# Altium PCB Holder_Base_V2.PcbDoc
Units mm, origin at the board's own origin, x right, y up, seen from the top; angles counter-clockwise.
Board outline 70 x 50 mm, 2 copper layers (Top Layer, Bottom Layer); 9 components, 27 nets, 35 pads, 0 vias.
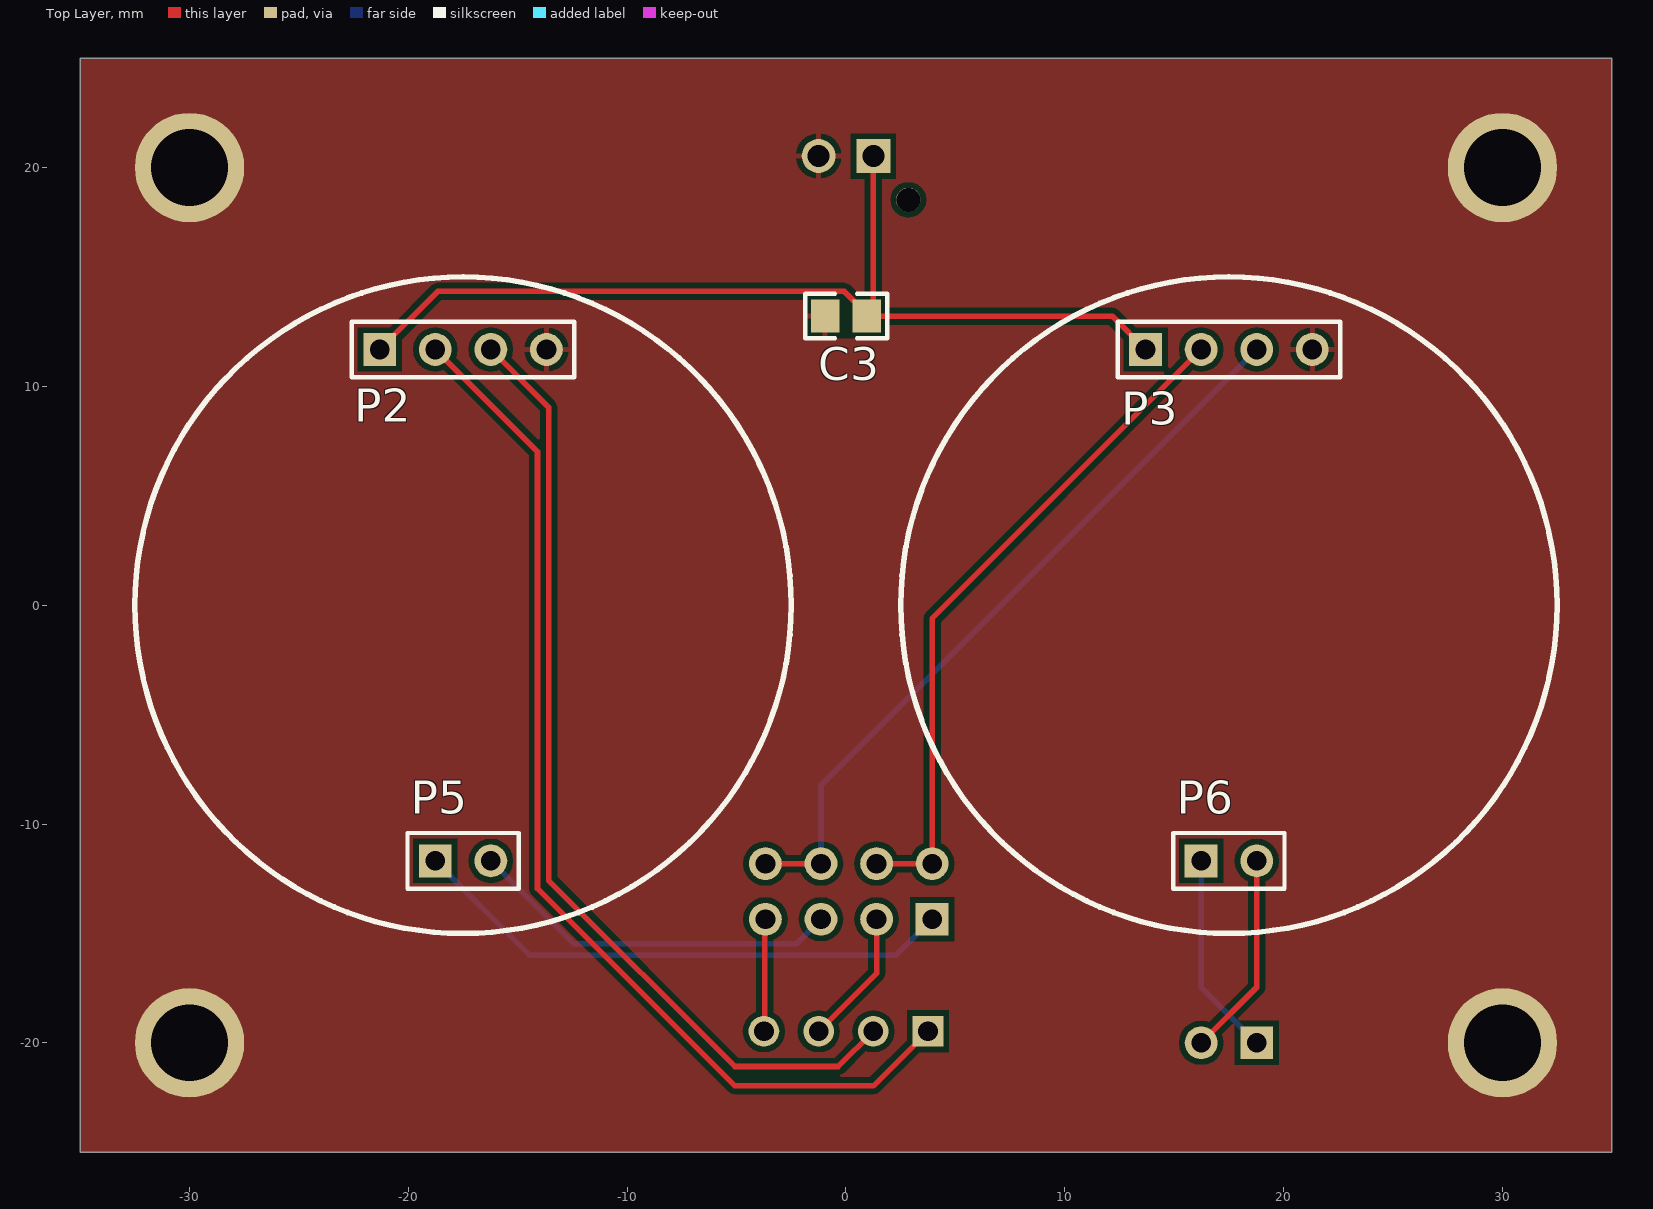
[diagram p0: Top Layer view]
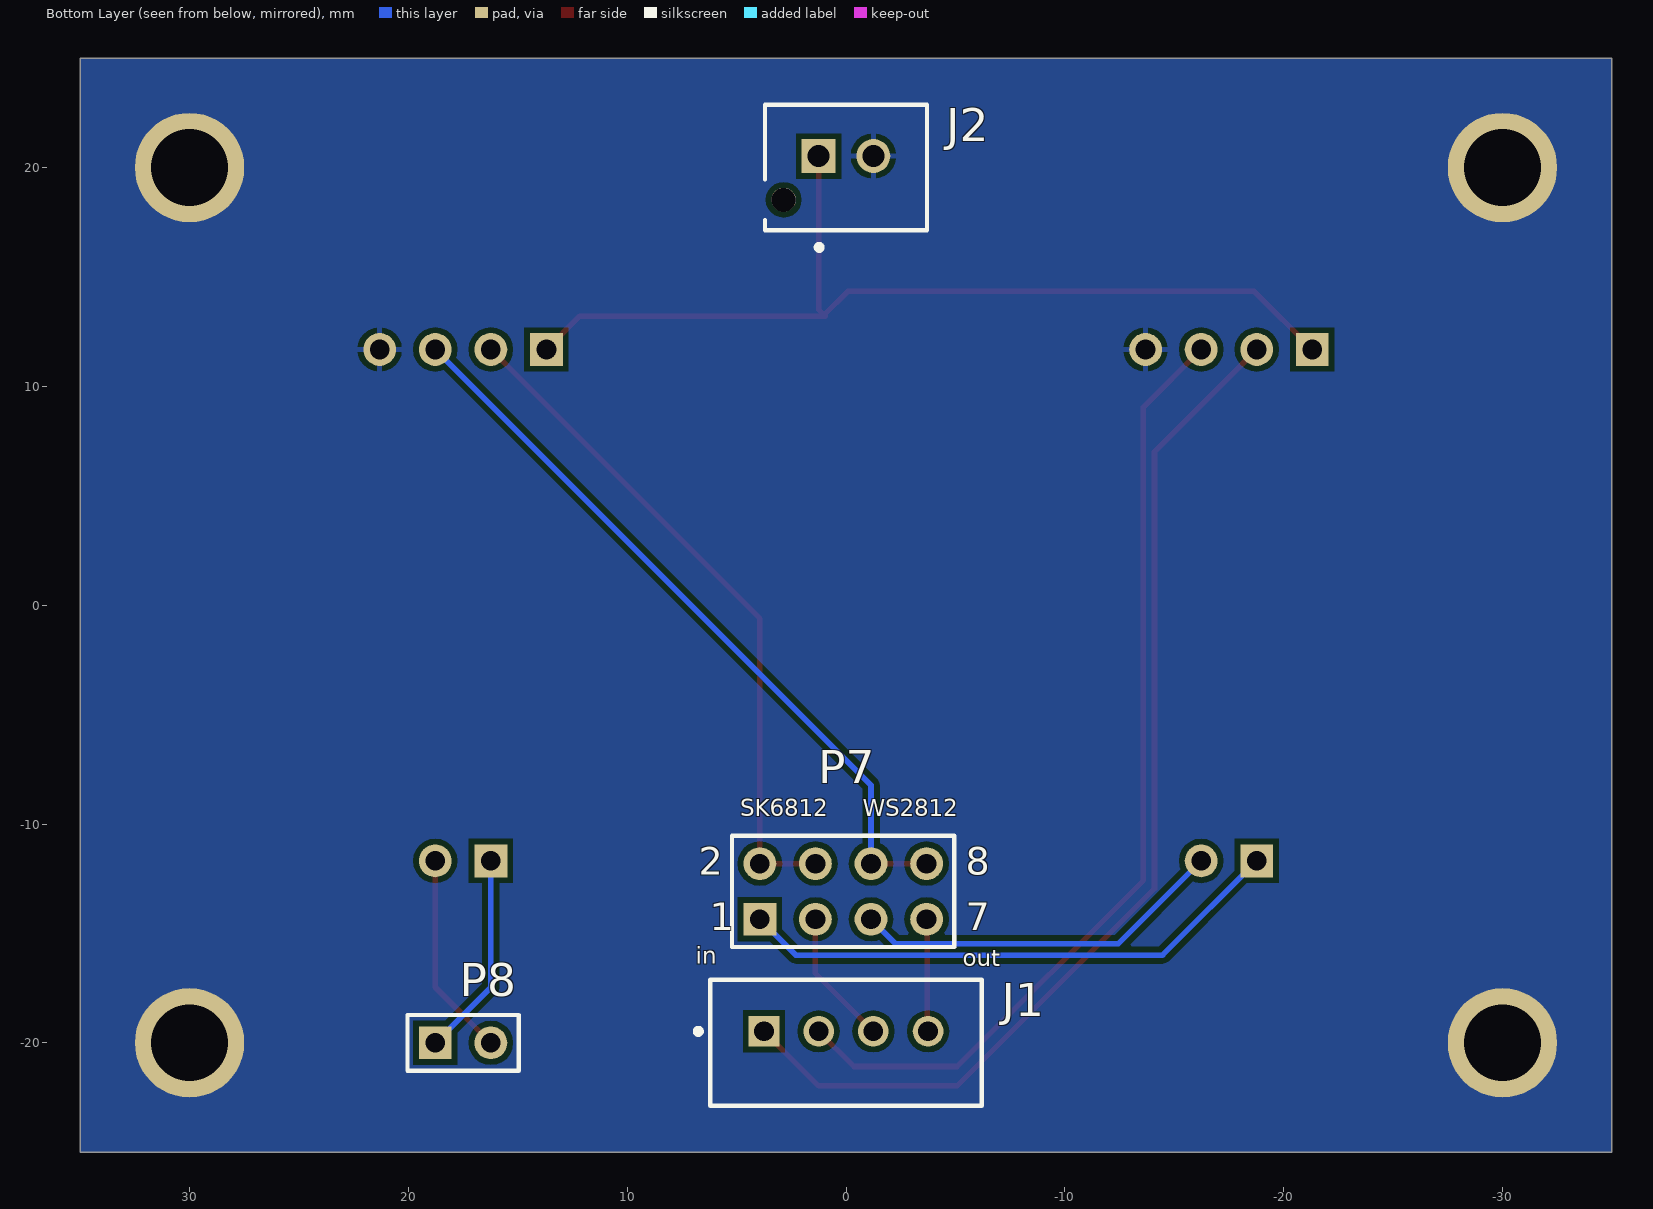
[diagram p1: Bottom Layer view, seen from below]

## Layer stack, top to bottom
Top Solder: solder mask 0.0102, Solder Resist, Dk 3.5
Top Layer: signal copper 0.0356
Dielectric 1: dielectric 0.32, FR-4, Dk 4.8
Bottom Layer: signal copper 0.0356
Bottom Solder: solder mask 0.0102, Solder Resist, Dk 3.5

## Board outline
-35,-25 -35,25 35,25 35,-25

## Design rules (kind name [scope] priority, off if disabled: settings)
BoardOutlineClearance [All] p1: gap=0.2 ignorepadtopadclearanceinfootprint=FALSE
Clearance [All] p1: gap=0.127 ignorepadtopadclearanceinfootprint=TRUE except(0.254: Arc-Hole Track-Hole SMDPad-Hole THPad-Hole Via-Hole Fill-Hole Poly-Hole Region-Hole Text-Hole)
ComponentClearance [All] p1: gap=0.127 collisioncheckmode=3 verticalgap=0.127 showdistances=TRUE
DiffPairsRouting [All] p1: maxlimit=0.254 minlimit=0.127 mostfreqgap=0.127 toplayer_minwidth=0.127 toplayer_maxwidth=25.4 toplayer_prefwidth=0.127 bottomlayer_minwidth=0.127 bottomlayer_maxwidth=25.4 bottomlayer_prefwidth=0.127 maxuncoupledlength=12.7
Height [All] p1: minheight=0 maxheight=1816.048 prefheight=12.7
HoleSize [All] p1: absolutevalues=TRUE maxlimit=6.3 minlimit=0.3 maxpercent=80.000 minpercent=20.000
HoleToHoleClearance [All] p1: gap=0.254 allowstackedmicrovias=FALSE
MinimumAnnularRing [All] p1: minimumring=0.152
MinimumSolderMaskSliver [All] p1: minsoldermaskwidth=0.152
PlaneClearance [All] p1: clearance=0.127
PlaneConnect PlaneConnectPowerPads [InPadClass('PowerPads')] p1: planeconnectstyle=Direct reliefexpansion=0.508 reliefentries=4 reliefconductorwidth=0.254 reliefairgap=0.254
PlaneConnect [All] p2: pad.planeconnectstyle=Relief pad.reliefexpansion=0.3 pad.reliefentries=4 pad.reliefconductorwidth=0.127 pad.reliefairgap=0.127 via.planeconnectstyle=Direct via.reliefexpansion=0.3 via.reliefentries=4 via.reliefconductorwidth=0.127 via.reliefairgap=0.127
PolygonConnect PolygonConnectPowerPads [All vs (InPadClass('PowerPads'))] p1: connectstyle=Direct reliefconductorwidth=0.254 reliefentries=4 polygonreliefangle="90 Angle" airgapwidth=0.254
PolygonConnect [All] p2: thpad.connectstyle=Relief thpad.reliefconductorwidth=0.127 thpad.reliefentries=4 thpad.polygonreliefangle="90 Angle" thpad.airgapwidth=0.127 smdpad.connectstyle=Relief smdpad.reliefconductorwidth=0.127 smdpad.reliefentries=4 smdpad.polygonreliefangle="90 Angle" smdpad.airgapwidth=0.127 via.connectstyle=Direct via.reliefconductorwidth=0.127 via.reliefentries=4 via.polygonreliefangle="90 Angle" via.airgapwidth=0.127
RoutingVias [All] p1: holewidth=0.3 width=0.6 viastyle="Through Hole" minholewidth=0.3 minwidth=0.6 maxholewidth=0.6 maxwidth=6.6
SilkToSilkClearance [All] p1: silktosilkclearance=0.127
SilkToSolderMaskClearance [IsPad] p1: minsilkscreentomaskgap=0.127 clearancetoexposedcopper=TRUE
SolderMaskExpansion [All] p1: expansion=0.051 istentingtop=FALSE
UnRoutedNet [All] p1: checkbadconnections=TRUE
Width Width_10mil [All] p1: maxlimit=25.4 minlimit=0.254 preferedwidth=0.254 minimp=50.000000 maximp=50.000000 favimp=50.000000
Width Width_6mil [All] p2: maxlimit=25.4 minlimit=0.152 preferedwidth=0.152 minimp=50.000000 maximp=50.000000 favimp=50.000000
Width Power_20mil [All] p3: maxlimit=25.4 minlimit=0.508 preferedwidth=0.508 minimp=50.000000 maximp=50.000000 favimp=50.000000
Width Power_12mil [All] p4: maxlimit=25.4 minlimit=0.305 preferedwidth=0.305 minimp=50.000000 maximp=50.000000 favimp=50.000000
Width Width_5mil [All] p5: maxlimit=25.4 minlimit=0.127 preferedwidth=0.127 minimp=50.000000 maximp=50.000000 favimp=50.000000
19 further rules are at their usual default settings.

## Components (designator, comment, footprint, x,y, rotation, side; value= is the part's Value field where it differs from the comment)
C3 "10uF" 0805C 0,13.208 r0 top
J1 "B4B-XH-A(LF)(SN)" FP-B4B-XH-A_LF_SN-MFG 0,-20 r0 bottom
J2 "B2B-XH-AM(LF)(SN)" FP-B2B-XH-AM_LF_SN-MFG 0,20 r0 bottom
P2 "Header 4" HDR1X4 -21.31,11.684 r0 top
P3 "Header 4" HDR1X4 13.69,11.684 r0 top
P5 "Header 2" HDR1X2 -18.77,-11.684 r0 top
P6 "Header 2" HDR1X2 16.23,-11.684 r0 top
P7 "Header 4X2" HDR2X4 3.937,-14.351 r180 bottom
P8 "Header 2" HDR1X2 18.77,-20 r180 bottom

## Footprints (in the part's own frame and the unit in brackets; to place one, negate y for a bottom-side part, rotate by r counter-clockwise, add the part's x,y. Pads: shape width x height; smd on the part's side, far side on the other; paste and mask are expansions set on the pad)
0805C [mm] "0805 Footprint"
  rect 1.3x1.5 smd: 1(-0.95,0) 2(0.95,0)
  silkscreen extent -1.87,-1.02 1.88,1.02, body extent -1,-0.62 1,0.63, height 0.78
FP-B2B-XH-AM_LF_SN-MFG [mm]
  rect 1.55x1.55 hole 1 paste-1000 mask+0: 1(1.25,-0.525)
  round 1.55 hole 1 paste-1000 mask+0: 2(-1.25,-0.525)
  round 1.1 hole 1.1 unplated paste-1000 mask+0: ""(2.85,1.475)
  silkscreen extent -3.7,-2.88 3.7,3.77, body extent -3.7,-2.88 3.7,2.88, height 7
FP-B4B-XH-A_LF_SN-MFG [mm]
  rect 1.4x1.4 hole 0.9 paste-1000 mask+0: 1(3.75,-0.525)
  round 1.4 hole 0.9 paste-1000 mask+0: 2(1.25,-0.525) 3(-1.25,-0.525) 4(-3.75,-0.525)
  silkscreen extent -6.2,-2.88 6.88,2.88, body extent -6.2,-2.88 6.2,2.88, height 7
HDR1X2 [mm] "Connector; Header; 2 Position"
  rect 1.5x1.5 hole 0.9: 1(0,0)
  round 1.5 hole 0.9: 2(2.54,0)
  silkscreen extent -1.27,-1.27 3.81,1.27
HDR1X4 [mm] "Connector; Header; 4 Position"
  rect 1.5x1.5 hole 0.9: 1(0,0)
  round 1.5 hole 0.9: 2(2.54,0) 3(5.08,0) 4(7.62,0)
  silkscreen extent -1.27,-1.27 8.89,1.27
HDR2X4 [mm] "Connector; Header; 4x2 Position"
  rect 1.5x1.5 hole 0.9: 1(0,0)
  round 1.5 hole 0.9: 2(0,2.54) 3(2.54,0) 4(2.54,2.54) 5(5.08,0) 6(5.08,2.54) 7(7.62,0) 8(7.62,2.54)
  silkscreen extent -1.27,-1.27 8.89,3.81

## Part data
C3: library part C, "Capacitor", Reviewed by="RM - 2018/08/05", Revision="July-2002: Re-released for DXP Platform."
J1: library part CMP-17439-000250-1, "CONN HEADER VERT 4POS 2.5MM", Color=Natural, Contact Resistance=20mR, Current Rating=3A, Flammability Rating="UL94 V-0", Housing Color=White, Insulation Resistance=1GR, Max Operating Temperature=85°C, Max Voltage Rating (AC)=250V, Min Operating Temperature=-25°C, Package Quantity=500, Connector Type=Header, Contact Finish - Mating=TIN, Contact Material=Brass, Contact Plating=Tin, Contact Shape=Square, Contact Type="Male Pin", Depth=5.75mm, Fastening Type=Detent, Gender=Male, Housing Material=Polyamide, Insulation Color=Natural, Insulation Material=Nylon, Lead Free="Lead Free", Lead Pitch=2.5mm, Length=12.4mm, Mated Stacking Heights=9.8mm, Material=Polyamide, Max Current Rating=3A, Max Voltage Rating (DC)=250V, Mount="Through Hole", Number of Contacts=4, Number of Positions=4, Number of Rows=1, Orientation=Straight, Packaging=Bulk, Pitch=2.5mm, REACH SVHC="No SVHC", Series=XH, Termination=Solder, Voltage Rating=250V, Voltage Rating (AC)=250V, Wire/Cable Gauge=22AWG
J2: library part CMP-17439-000037-1, "CONN HEADER VERT 2POS 2.5MM", Color=Green, Contact Resistance=20mR, Housing Color=White, Max Current Rating=3A, Max Operating Temperature=85°C, Max Voltage Rating (AC)=250V, Min Operating Temperature=-25°C, Connector Type="Male Pin", Contact Material=Brass, Contact Plating=Tin, Contact Type="Male Pin", Depth=5.75mm, Fastening Type=Detent, Housing Material=Polyamide, Lead Free="Lead Free", Length=7.4mm, Mount="Through Hole", Number of Positions=2, Number of Rows=1, Orientation=Straight, Packaging=Bulk, Pitch=2.5mm, Series=XH, Termination=Solder
P2 P3: "Header, 4-Pin", LatestRevisionDate=17-Jul-2002, LatestRevisionNote="Re-released for DXP Platform.", Publisher="Altium Limited"
P5 P6 P8: "Header, 2-Pin", LatestRevisionDate=17-Jul-2002, LatestRevisionNote="Re-released for DXP Platform.", Publisher="Altium Limited"
P7: "Header, 4-Pin, Dual row", LatestRevisionDate=17-Jul-2002, LatestRevisionNote="Re-released for DXP Platform.", Publisher="Altium Limited"

## Free pads (board coordinates)
  round 5 hole 3.5: 2(-30,20) 3(-30,-20) 4(30,-20) 5(30,20)

## Nets (pads, with @x,y where several pads share a name; then routed paths per layer and width w, separated by ;. In a path a pad name is that pad's centre, name@x,y a point inside that pad or via, vN(x,y) a via of type N, cw(c..) or ccw(c..) an arc to the next point about the centre after c; other vN are vias at no path point)
DIN_SK6812: 
DIN_SK6812_1: J1.1 P2.2 | length 49.2
  Top Layer w0.254: P2.2 -14.097,7.011 -14.097,-12.954 -5.08,-21.971 1.254,-21.971 J1.1
DIN_SK6812_2: P3.2 P7.2 P7.4 | length 31.1
  Top Layer w0.254: P7.4 P7.2 3.937,-0.609 P3.2
DIN_SK6812_2_P: J1.3 P7.3 | length 6.2
  Top Layer w0.254: J1.3 1.397,-16.828 P7.3
DIN_WS2812: 
DIN_WS2812_1: J1.2 P2.3 | length 44.4
  Top Layer w0.254: P2.3 -13.589,9.043 -13.589,-12.573 -5.08,-21.082 -0.357,-21.082 J1.2
DIN_WS2812_2: P3.3 P7.6 P7.8 | length 34.3
  Top Layer w0.254: P7.8 P7.6
  Bottom Layer w0.254: P7.6 -1.143,-8.229 P3.3
DIN_WS2812_2_P: J1.4 P7.7 | length 5.2
  Top Layer w0.254: J1.4 -3.717,-19.442 -3.717,-14.385 P7.7
DOUT1: 
DOUT2: 
DOUT3: 
DOUT4: 
DOUT5: 
DOUT6: 
DOUT7: 
DOUT8: 
DOUT9: 
DOUT_SK6812: 
DOUT_SK6812_1: P5.1 P7.1 | length 25.2
  Bottom Layer w0.254: P5.1 -14.464,-15.99 2.298,-15.99 P7.1
DOUT_SK6812_2: P6.1 P8.1 | length 9.4
  Bottom Layer w0.254: P6.1 16.23,-17.46 P8.1
DOUT_WS2812: 
DOUT_WS2812_1: P5.2 P7.5 | length 17.1
  Bottom Layer w0.254: P5.2 -12.432,-15.482 -2.274,-15.482 P7.5
DOUT_WS2812_2: P6.2 P8.2 | length 9.4
  Top Layer w0.254: P8.2 18.77,-17.46 P6.2
GND: C3.1 J2.2 P2.4 P3.4 pad.2 pad.3 pad.4 pad.5
NetP1_1: 
VCC: C3.2 J2.1 P2.1 P3.1 | length 44.7
  Top Layer w0.254: P2.1 -18.655,14.339 -0.081,14.339 0.95,13.308 C3.2 ; J2.1 1.25,13.508 C3.2 ; P3.1 12.166,13.208 C3.2
VDD: 
pads on no net: J2.

## Polygon pours and split planes (outlines as drawn)
GND on Top Layer "GND_TOP" (solid, pour order 0): -35,-25 -35,25 35,25 35,-25
GND on Bottom Layer "GND_BOT" (solid, pour order 3): -35,-25 -35,25 35,25 35,-25

## Silkscreen, mask and mechanical layers (free items; w line width, h text height)
Top Overlay:
  circle w0.254: c-17.5,0 r15
  circle w0.254: c17.5,0 r15
Bottom Overlay:
  text "WS2812" at -0.762,-9.652 h0.76
  text "SK6812" at 4.826,-9.652 h0.76
  text "in" at 6.858,-16.383 h0.76
  text "out" at -5.334,-16.51 h0.76
Mechanical 1:
  the board outline again, w0.254
Bottom Courtyard:
  lines w0.254: 19.981,-0.017 19.981,0.046

## Text inside footprints (layer, text, board x,y; h text height)
P7: Bottom Overlay "2" at 6.731,-12.319 h1.27; Bottom Overlay "1" at 6.223,-14.859 h1.27; Bottom Overlay "7" at -5.461,-14.859 h1.27; Bottom Overlay "8" at -5.461,-12.319 h1.27